# EAGLE board LinearSlider (EAGLE 6.2)
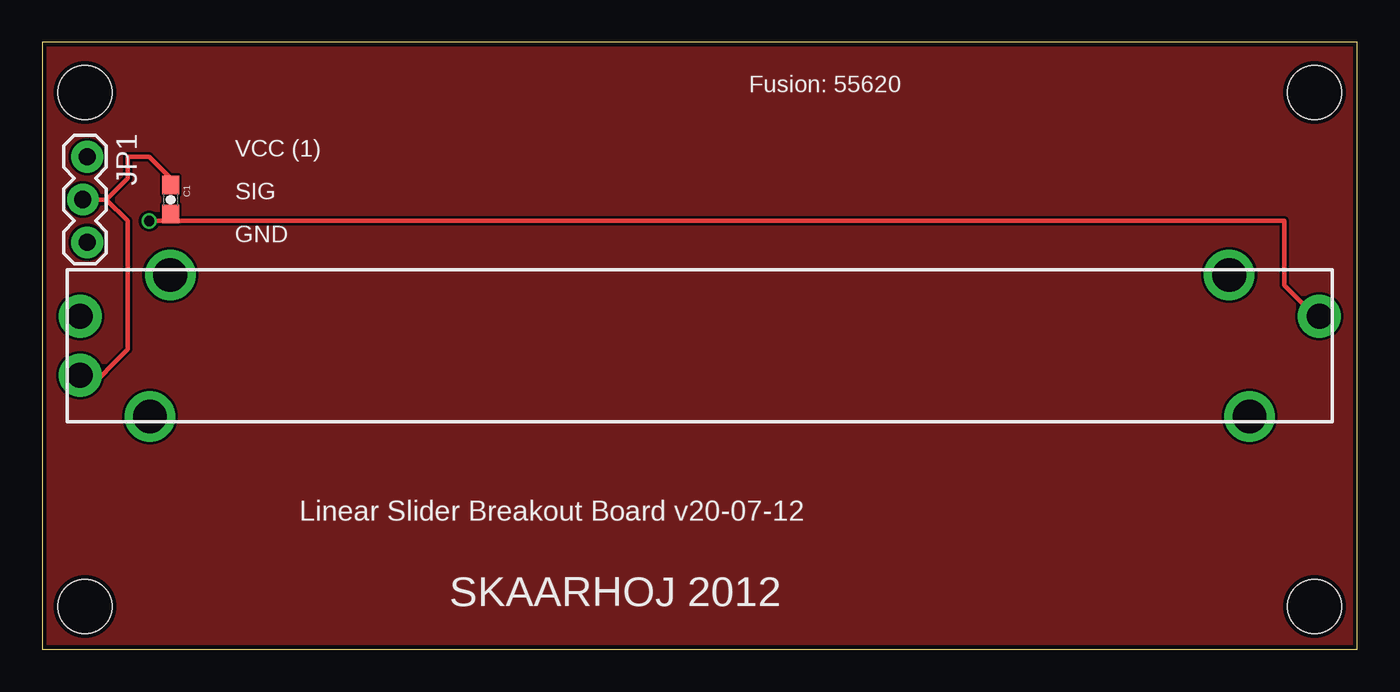
[diagram p0: board, top side]
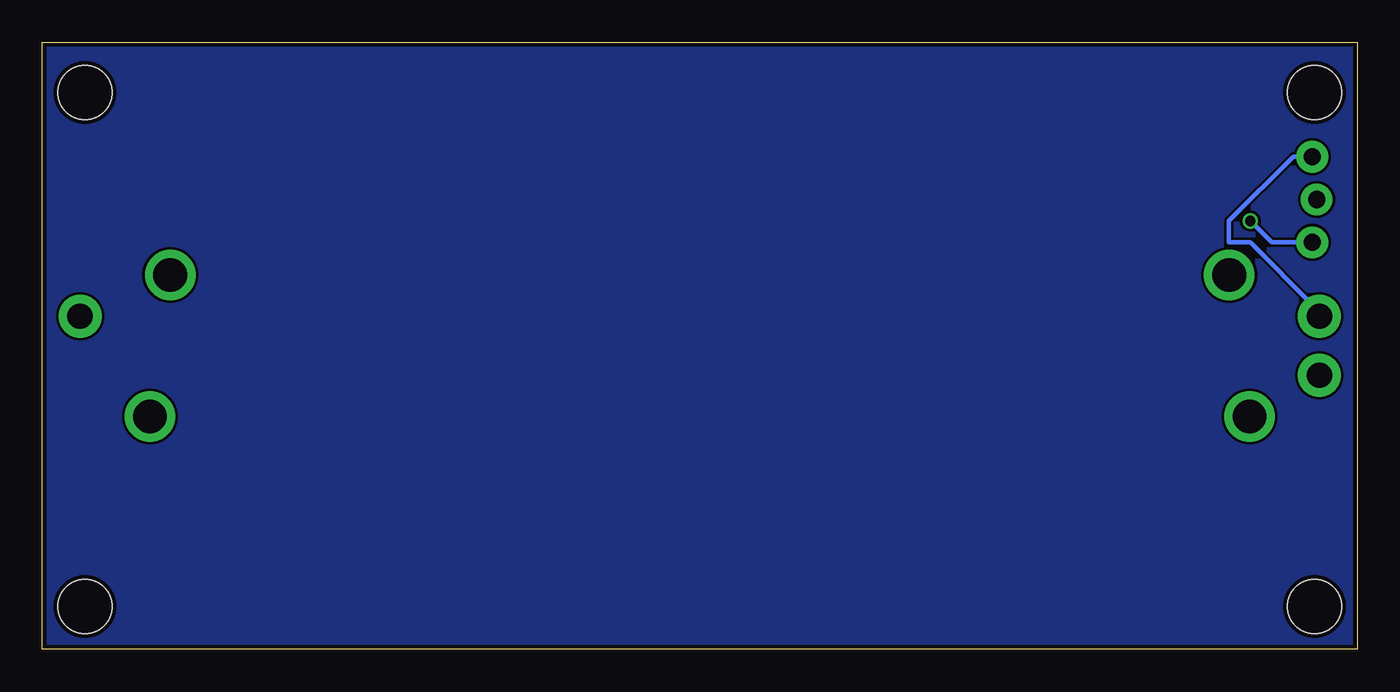
[diagram p1: board, bottom side, seen from below]

Size 78 x 36 mm. Coordinates in mm from the lower left corner, seen from the top.
Outline: 0,0 78,0 78,36 0,36 0,0
Copper layers (1*16): Top 0.035mm / dielectric 1.5mm / Bottom 0.035mm
Design rules: minimum track width 6mil, minimum drill 12mil, track to track 6mil, track to pad 6mil, pad to pad 6mil, via to via 6mil, smd to smd 0mil, copper to edge 10mil, drill to drill 10mil, minimum pad ring 10mil, minimum via ring 6mil, stop-mask expansion 2mil, vias tented up to drill 100mil, thermal gap 10mil
Holes 3.2 mm at 2.54,2.54 2.54,33.02 75.46,33.02 75.46,2.54

## Footprints (pad centres in the part's own frame; a part is rotated, then mirrored left to right if it is on the bottom)
0603-CAP = smd 1.1 x 1: 1 -0.85,0; 2 0.85,0
1X03_LOCK = drill 1.016 pad 1.88: 1 0,0.127; 2 2.54,-0.127; 3 5.08,0.127
SLIDER60 = drill 1.5 pad 2.54: 1 -36.75,1.75; 2A -36.75,-1.75; 3 36.75,1.75 | drill 2: P$1 -31.4,4.2; P$2 31.4,4.2; P$3 32.6,-4.2; P$4 -32.6,-4.2

## Placement (x,y rotation side)
C1  10nF  [0603-CAP]  7.62,26.67 270 top
JP1  [1X03_LOCK]  2.54,29.21 270 top
POT1  10K Linear  [SLIDER60]  39,18 0 top

## Library data of the parts
C1 JP1 = SparkFun
POT1 = SKAARHOJ

## Nets
N$1: C1.2 JP1.3 POT1.3
N$2: C1.1 JP1.2 POT1.2A
N$3: JP1.1 POT1.1

## Tracks (layer width: path | path; a pad name or v marks a point on that pad's centre or on a via)
N$1  (via drill 0.61)
  Top 0.254: v6.35,25.4 7.62,25.4 | 7.62,25.4 73.66,25.4 73.66,21.59 74.93,20.32 POT1.3 | 7.62,25.4 C1.2
  Bottom 0.254: v6.35,25.4 5.08,24.13 JP1.3 2.54,24.13
N$2
  Top 0.254: 3.81,26.67 5.08,27.94 5.08,29.21 6.35,29.21 7.62,27.94 C1.1 | JP1.2 3.81,26.67 | 3.81,26.67 5.08,25.4 5.08,17.78 2.54,15.24 POT1.2A
N$3
  Bottom 0.254: 2.54,29.21 JP1.1 3.81,29.21 7.62,25.4 7.62,24.13 6.35,24.13 2.54,20.32 POT1.1
N$4
  pour Bottom: 0,35.56 78,35.56 78,0 0,0
N$5
  pour Top: 0,35.56 78,35.56 78,0 0,0

## Text on the board
_tsilk: Fusion: 55620 | VCC (1) | SIG | GND | Linear Slider Breakout Board v20-07-12 | SKAARHOJ 2012